# EAGLE board mwscoretransponder (EAGLE 6.0)
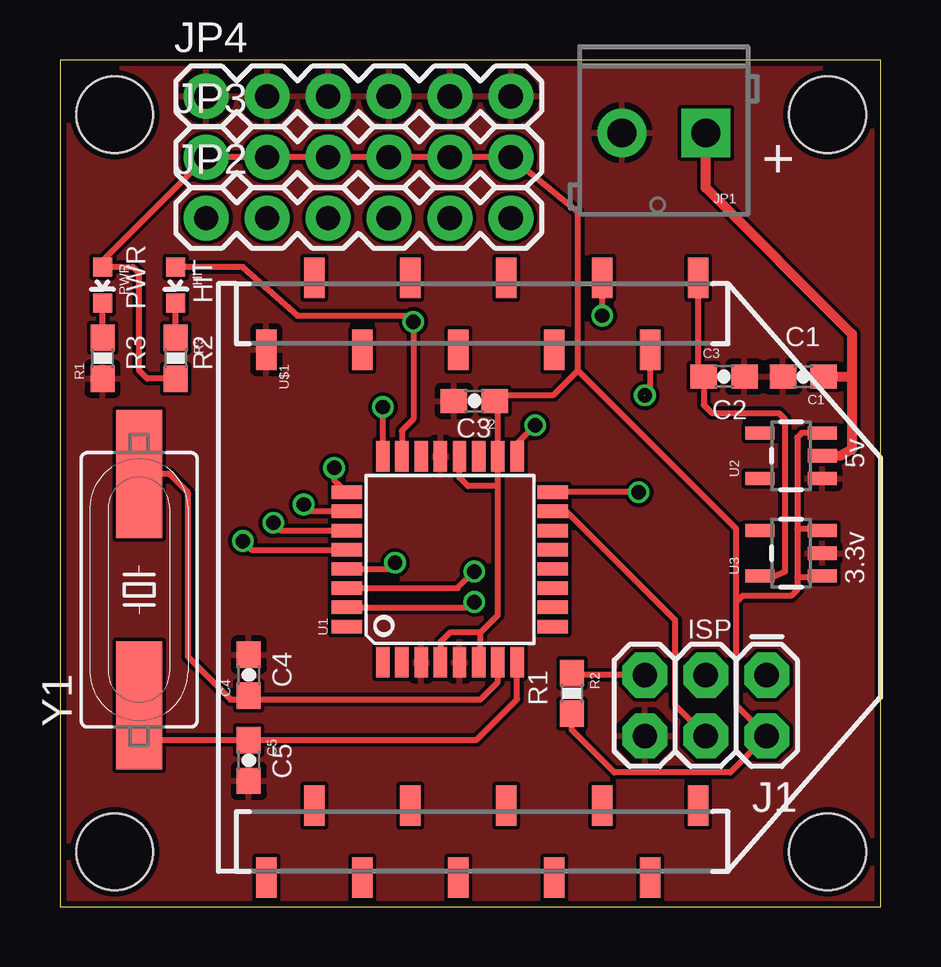
[diagram p0: board, top side]
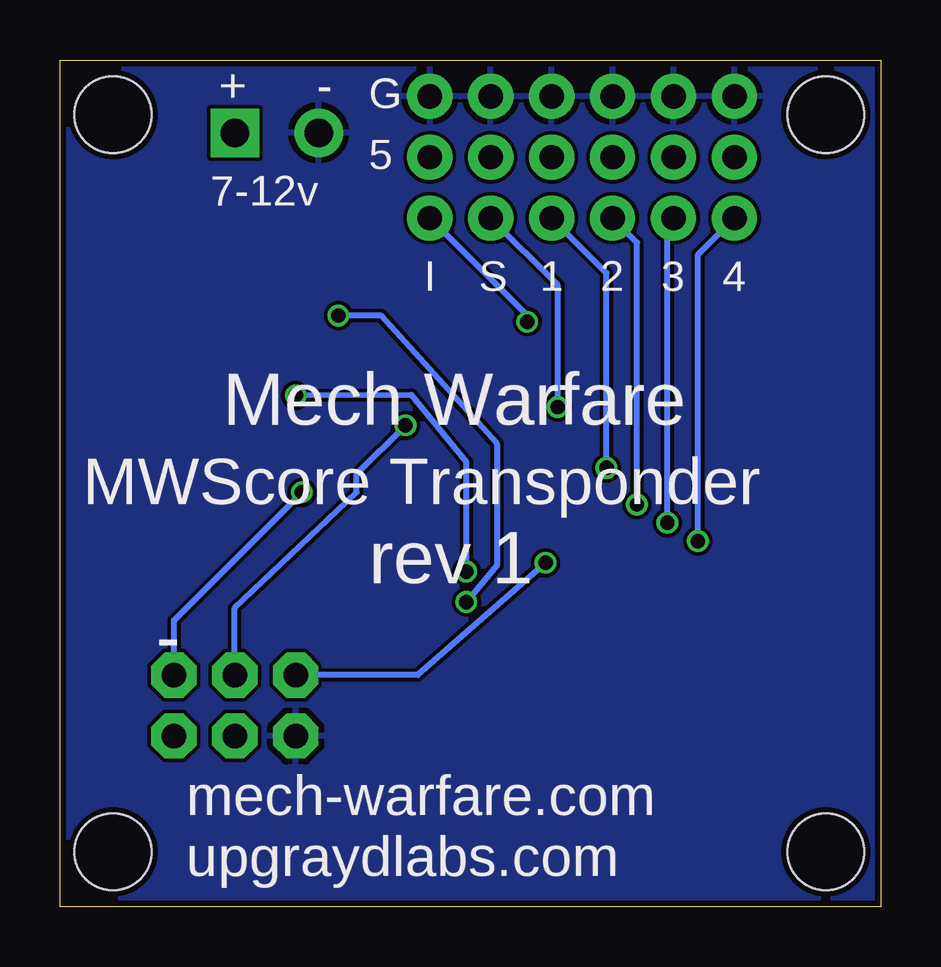
[diagram p1: board, bottom side, seen from below]

Size 34.21 x 35.3 mm. Coordinates in mm from the lower left corner, seen from the top.
Outline: 0,0 34.21,0 34.21,35.3 0,35.3 0,0
Copper layers (1*16): Top 0.035mm / dielectric 1.5mm / Bottom 0.035mm
Design rules: minimum track width 6mil, minimum drill 12mil, track to track 6mil, track to pad 6mil, pad to pad 6mil, via to via 6mil, smd to smd 0mil, copper to edge 10mil, drill to drill 10mil, minimum pad ring 10mil, minimum via ring 6mil, stop-mask expansion 2mil, vias tented up to drill 100mil, thermal gap 10mil
Holes 3.2 mm at 2.29,2.29 32,2.29 32,33.02 2.29,33.02

## Footprints (pad centres in the part's own frame; a part is rotated, then mirrored left to right if it is on the bottom)
0603-CAP = smd 1.1 x 1: 1 -0.85,0; 2 0.85,0
LED-0603 = smd 0.8 x 0.8: A 0,-0.75; C 0,0.75
2X3 = drill 1.016 pad 1.88 octagon: 1 0,0; 2 0,2.54; 3 2.54,0; 4 2.54,2.54; 5 5.08,0; 6 5.08,2.54
SCREWTERMINAL-3.5MM-2-NS = drill 1.2 pad 2.032 square: 1 0,0 | drill 1.2 pad 2.032: 2 3.5,0
1X06 = drill 1.016 pad 1.88: 1 0,0; 2 2.54,0; 3 5.08,0; 4 7.62,0; 5 10.16,0; 6 12.7,0
0603-RES = smd 1.1 x 1: 1 -0.85,0; 2 0.85,0
TQFP32-08 = smd 1.27 x 0.559: 1 -4.293,2.8; 2 -4.293,2; 3 -4.293,1.2; 4 -4.293,0.4; 5 -4.293,-0.4; 6 -4.293,-1.2; 7 -4.293,-2; 8 -4.293,-2.8; 17 4.293,-2.8; 18 4.293,-2; 19 4.293,-1.2; 20 4.293,-0.4; 21 4.293,0.4; 22 4.293,1.2; 23 4.293,2; 24 4.293,2.8 | smd 0.559 x 1.27: 9 -2.8,-4.293; 10 -2,-4.293; 11 -1.2,-4.293; 12 -0.4,-4.293; 13 0.4,-4.293; 14 1.2,-4.293; 15 2,-4.293; 16 2.8,-4.293; 25 2.8,4.293; 26 2,4.293; 27 1.2,4.293; 28 0.4,4.293; 29 -0.4,4.293; 30 -1.2,4.293; 31 -2,4.293; 32 -2.8,4.293
SOT23-5 = smd 0.55 x 1.2: 1 -0.95,-1.3; 2 0,-1.3; 3 0.95,-1.3; 4 0.95,1.3; 5 -0.95,1.3
XBEE-SMD = smd 1.7 x 0.85: 1 -12.5,20; 2 -9.5,18; 3 -12.5,16; 4 -9.5,14; 5 -12.5,12; 6 -9.5,10; 7 -12.5,8; 8 -9.5,6; 9 -12.5,4; 10 -9.5,2; 11 12.5,2; 12 9.5,4; 13 12.5,6; 14 9.5,8; 15 12.5,10; 16 9.5,12; 17 12.5,14; 18 9.5,16; 19 12.5,18; 20 9.5,20
HC49UP = smd 5.334 x 1.93: 1 -4.826,0; 2 4.826,0

## Placement (x,y rotation side)
C1  [0603-CAP]  30.99,22.1 180 top
C2  [0603-CAP]  17.27,21.08 180 top
C3  [0603-CAP]  27.69,22.1 0 top
C4  [0603-CAP]  7.87,9.65 90 top
C5  [0603-CAP]  7.87,6.1 270 top
HIT  [LED-0603]  4.83,25.91 180 top
J1  ISP  [2X3]  29.46,9.65 180 top
JP1  [SCREWTERMINAL-3.5MM-2-NS]  26.92,32.26 180 top
JP2  [1X06]  6.1,28.7 0 top
JP3  [1X06]  6.1,31.24 0 top
JP4  [1X06]  6.1,33.78 0 top
PWR  [LED-0603]  1.78,25.91 180 top
R1  [0603-RES]  1.78,22.86 90 top
R2  [0603-RES]  21.34,8.89 270 top
R3  [0603-RES]  4.83,22.86 270 top
U1  ATMEGA168  [TQFP32-08]  16.26,14.48 90 top
U2  5V  [SOT23-5]  30.48,18.8 90 top
U3  3.3V  [SOT23-5]  30.48,14.73 90 top
U$1  XBEE-1B3  [XBEE-SMD]  6.6,13.72 270 top
Y1  [HC49UP]  3.3,13.21 90 top

## Library data of the parts
C1-C5 HIT J1 JP1-JP4 PWR R1-R3 U1-U3 U$1 Y1 = SparkFun

## Nets
3.3V: C3.1 U3.5 U$1.1
5V: C2.1 J1.2 JP3.1 JP3.2 JP3.3 JP3.4 JP3.5 JP3.6 PWR.A R2.2 R3.2 U1.4 U1.6 U1.18 U1.20 U2.3 U3.1 U3.3
GND: C1.2 C2.2 C3.2 C4.2 C5.2 J1.6 JP1.2 JP4.1 JP4.2 JP4.3 JP4.4 JP4.5 JP4.6 R1.1 U1.3 U1.5 U1.21 U2.1 U3.2 U$1.10
MISO: J1.1 U1.16
MOSI: J1.4 U1.15
N$1: PWR.C R1.2
N$2: C4.1 U1.7 Y1.2
N$3: C5.1 U1.8 Y1.1
N$4: HIT.C R3.1
N$5: U1.30 U$1.2
N$6: U1.31 U$1.3
RESET: J1.5 R2.1 U1.29
SCK: J1.3 U1.17
TP0: JP2.4 U1.25
TP1: JP2.3 U1.26
TP2: JP2.2 U1.27
TP3: JP2.1 U1.28
TPOUT: JP2.5 U1.24
TPOUT2: HIT.A JP2.6 U1.23
VCC: C1.1 JP1.1 U2.2

## Tracks (layer width: path | path; a pad name or v marks a point on that pad's centre or on a via)
3.3V
  Top 0.254: 26.74,22.25 C3.1 | C3.1 26.6,22.58 U$1.1 | C3.1 26.84,20.92 27.18,20.57 29.97,20.57 30.23,20.32 30.23,13.97 29.78,13.78 U3.5
5V
  Top 0.254: 18.26,17.53 18.26,12.16 17.53,11.43 | 18.26,17.53 U1.18 18.26,20.96 C2.1 18.38,21.34 20.57,21.34 21.59,22.35 | 17.53,11.43 17.53,10.26 U1.6 | U1.4 15.86,11.03 16.26,11.43 17.53,11.43 | U1.20 16.66,17.89 17.02,17.53 18.26,17.53 | 21.59,22.35 21.59,28.96 JP3.6 JP3.5 JP3.4 JP3.3 JP3.2 JP3.1 1.78,26.92 PWR.A 2.55,26.67 3.05,26.67 3.3,26.42 3.3,22.35 3.64,22.01 R3.2 | R2.2 21.42,8.13 21.34,8.13 21.34,7.37 23.11,5.59 27.94,5.59 J1.2 28.19,8.38 28.19,12.7 | 28.19,12.7 28.19,15.75 21.59,22.35 | 28.19,12.7 28.45,12.95 30.48,12.95 30.73,13.21 30.73,13.72 | U2.3 30.92,19.75 30.73,19.56 30.73,15.75 | 30.73,15.75 30.73,13.72 | U3.1 31.71,13.72 30.73,13.72 | U3.3 31.71,15.75 30.73,15.75
GND
  pour Top: 0,35.56 0,0 34.29,0 34.29,35.56
  pour Bottom: 0,35.56 0,0 34.29,0 34.29,35.56
MISO  (via drill 0.6)
  Top 0.254: U1.16 23.87,17.28 v24.13,17.27
  Bottom 0.254: J1.1 29.46,11.94 v24.13,17.27
MOSI
  Top 0.254: U1.15 21.11,16.48 25.65,11.94 25.65,8.38 J1.4
N$1
  Top 0.254: R1.2 PWR.C
N$2
  Top 0.254: Y1.2 4.57,18.03 5.33,17.27 5.33,10.41 7.11,8.64 7.79,8.64 | U1.7 18.26,9.37 17.53,8.64 7.79,8.64 | 7.79,8.64 C4.1
N$3
  Top 0.254: U1.8 19.06,8.64 17.36,6.95 C5.1 3.72,6.95 Y1.1
N$4
  Top 0.254: R3.1 HIT.C
N$5  (via drill 0.6)  (1 unrouted)
  Top 0.254: U1.30 16.58,13.28 v17.27,13.97 | U$1.2 24.6,21.66 arc-45 24.53,21.48 24.38,21.34
  Bottom 0.254: v17.27,13.97 17.27,18.54 19.56,21.34 v24.38,21.32
N$6  (via drill 0.6)
  Top 0.254: v22.61,24.64 22.61,25.65 | 22.61,25.65 22.61,25.91 22.86,26.16 22.61,26.16 | U$1.3 22.6,25.66 22.61,25.65 | U1.31 16.99,12.48 v17.27,12.7
  Bottom 0.254: v22.61,24.64 20.83,24.64 16,19.3 16,14.22 v17.27,12.7
RESET  (via drill 0.6)
  Top 0.254: R2.1 21.42,9.65 J1.5 | U1.29 13.72,14.08 v13.97,14.33
  Bottom 0.254: J1.5 19.3,9.65 v13.97,14.33
SCK  (via drill 0.6)
  Top 0.254: v19.81,20.07 19.05,19.3 U1.17
  Bottom 0.254: J1.3 26.92,12.45 21.84,17.27 21.84,18.03 v19.81,20.07
TP0  (via drill 0.6)
  Top 0.254: U1.25 11.46,17.75 v11.43,18.29
  Bottom 0.254: v11.43,18.29 11.43,26.42 JP2.4
TP1  (via drill 0.6)
  Top 0.254: U1.26 10.45,16.48 v10.16,16.76
  Bottom 0.254: JP2.3 10.16,27.69 v10.16,16.76
TP2  (via drill 0.6)
  Top 0.254: U1.27 9.21,15.68 v8.89,16
  Bottom 0.254: JP2.2 8.89,28.45 v8.89,16
TP3  (via drill 0.6)
  Top 0.254: U1.28 7.98,14.88 v7.62,15.24
  Bottom 0.254: JP2.1 7.62,27.18 v7.62,15.24
TPOUT  (via drill 0.6)
  Top 0.254: v13.46,20.83 U1.24
  Bottom 0.254: v13.46,20.83 13.46,25.91 JP2.5
TPOUT2  (via drill 0.6)
  Top 0.254: U1.23 14.26,19.84 14.73,20.32 v14.73,24.38 14.48,24.64 9.91,24.64 7.62,26.67 5.08,26.67 4.83,26.42 HIT.A 4.84,26.4
  Bottom 0.254: v14.73,24.38 14.73,24.64 JP2.6
VCC
  Top 0.406: JP1.1 26.92,29.97 33.02,23.88 33.02,22.1 | 31.84,22.01 C1.1 33.02,22.1 | 33.02,22.1 33.02,19.05 32.51,18.8 U2.2

## Text on the board
_tsilk: + | PWR | HIT | C1 | R3 | R2 | C3 | C2 | 5v | 3.3v | ISP | C4 | R1 | C5
_bsilk: - | + | G | 5 | 7-12v | 4 | 3 | 2 | 1 | S | I | Mech Warfare | MWScore Transponder | rev 1 | - | mech-warfare.com | upgraydlabs.com